# Altium PCB ECUCheater.PcbDoc
Units mm, origin at the board's own origin, x right, y up, seen from the top; angles counter-clockwise.
Board outline 152.4 x 101.6 mm, 2 copper layers (Top Layer, Bottom Layer); 49 components, 79 nets, 177 pads, 17 vias.
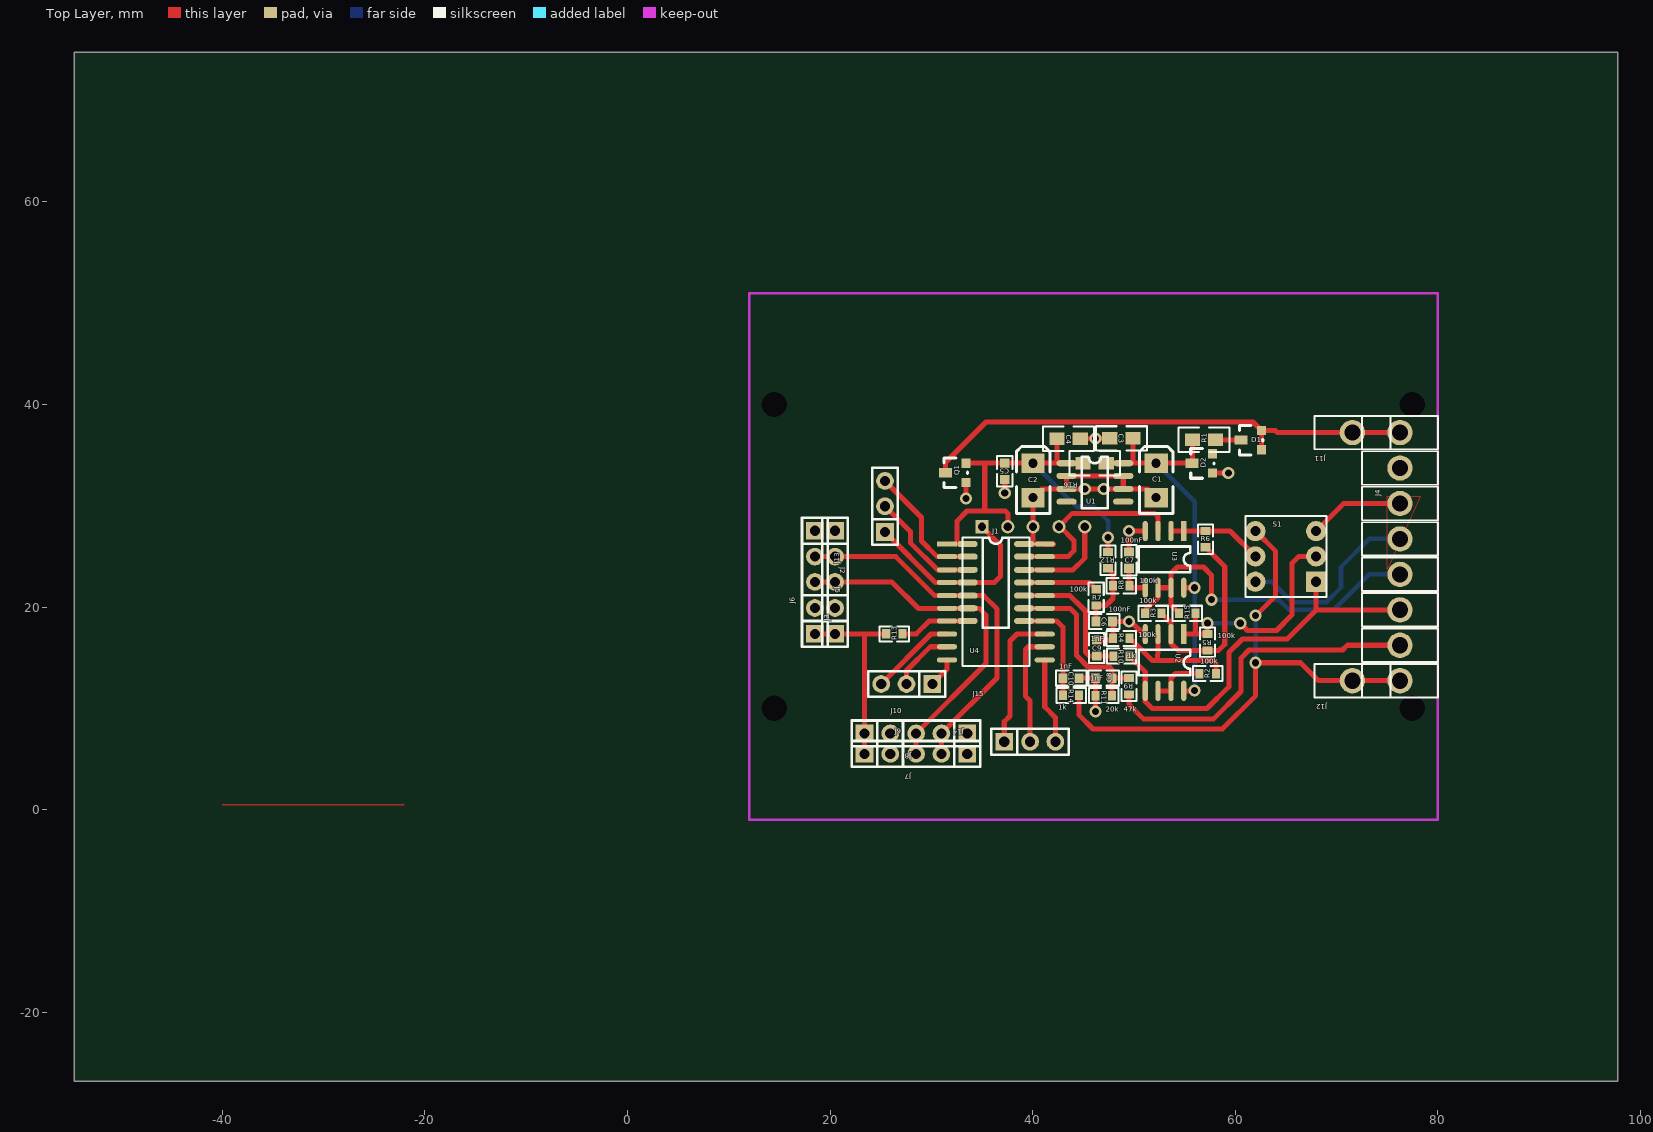
[diagram p0: Top Layer view]
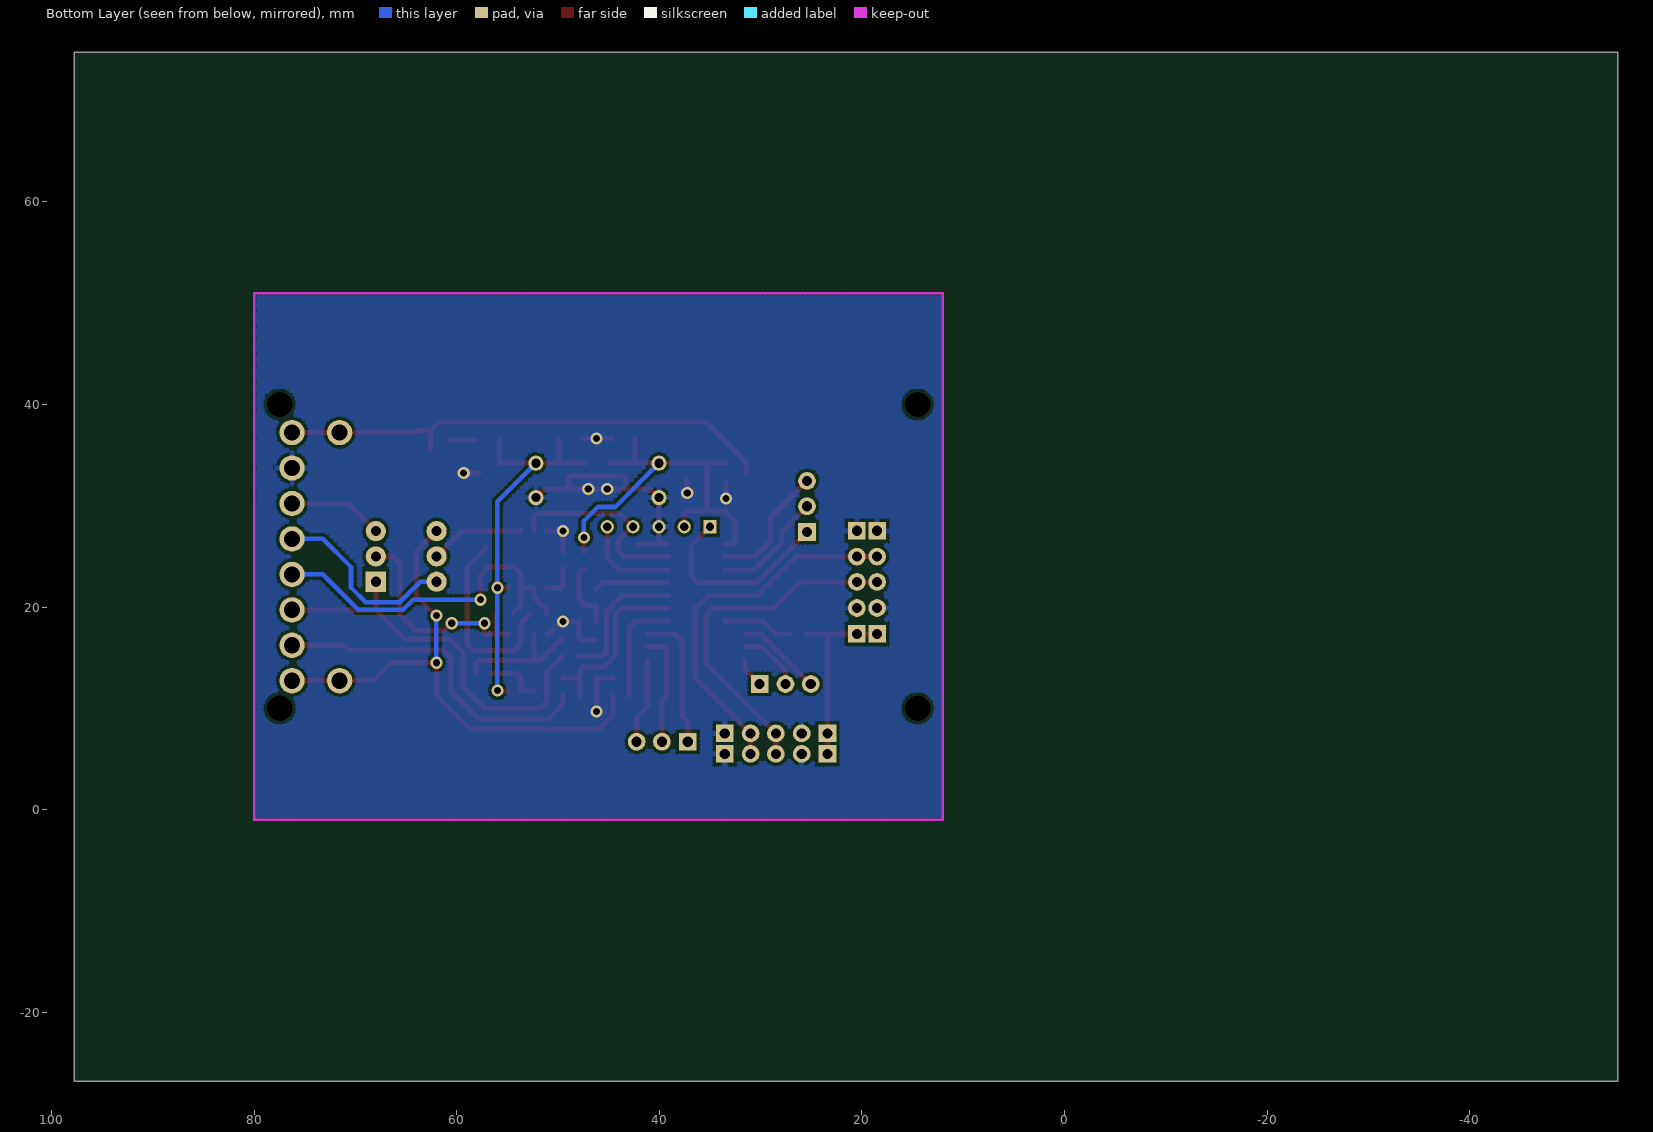
[diagram p1: Bottom Layer view, seen from below]

## Layer stack, top to bottom
Top Solder: solder mask 0.0102, Solder Resist, Dk 3.5
Top Layer: signal copper 0.0356
Dielectric1: dielectric 0.32, FR-4, Dk 4.8
Bottom Layer: signal copper 0.0356
Bottom Solder: solder mask 0.0102, Solder Resist, Dk 3.5

## Board outline
-54.625,-26.825 97.775,-26.825 97.775,74.775 -54.625,74.775

## Design rules (kind name [scope] priority, off if disabled: settings)
Clearance "Clearance Keepout" [OnLayer('Keep-Out Layer')] p1: gap=0
Clearance [All] p2: gap=0.3
Clearance "Clearance Polygon" [All vs (IsPolygon)] p3: gap=0.5
ComponentClearance [All] p1 off: gap=0 collisioncheckmode=3 verticalgap=0.254 showdistances=FALSE
FabricationTestPointUsage TestPointUsage [All] p1: valid=0 allowmultiple=FALSE
FabricationTestpoint Testpoint [All] p1: side=3 testpointundercomponent=TRUE minsize=1.016 maxsize=2.54 preferedsize=1.524 minholesize=0 maxholesize=1.016 preferedholesize=0.813 testpointgrid=0.025 allowsidetop=TRUE allowsidebottom=TRUE usegrid=TRUE gridtolerance=0
HoleSize [All] p1: absolutevalues=TRUE maxlimit=5 minlimit=0.7 maxpercent=80.000 minpercent=20.000
PolygonConnect PolygonConnect_PGND [InNet('PGND')] p1: connectstyle=Relief reliefconductorwidth=0.5 reliefentries=4 polygonreliefangle="90 Angle" airgapwidth=0.254
PolygonConnect PolygonConnectGND [InNet('GND')] p2: connectstyle=Relief reliefconductorwidth=0.5 reliefentries=4 polygonreliefangle="90 Angle" airgapwidth=0.254
PolygonConnect [All] p3: connectstyle=Direct reliefconductorwidth=0.5 reliefentries=4 polygonreliefangle="90 Angle" airgapwidth=0.254
RoutingVias [All] p1: holewidth=0.711 width=1.27 viastyle="Through Hole" minholewidth=0.711 minwidth=1.27 maxholewidth=0.711 maxwidth=1.27
SolderMaskExpansion [All] p1: expansion=0.102
UnpouredPolygon [All] p1: allowunpoured=FALSE
Width [All] p1: maxlimit=5 minlimit=0.45 preferedwidth=0.5 bottomlayer_prefwidth=0.45 minimp=50.000000 maximp=50.000000 favimp=50.000000
25 further rules are at their usual default settings.

## Components (designator, comment, footprint, x,y, rotation, side; value= is the part's Value field where it differs from the comment)
C1 "330uF" "3528 + RA 6.3mm NOT ROUND" 52.2,34.2 r90 top
C2 "330uF" "3528 + RA 6.3mm NOT ROUND" 40.05,34.2 r90 top
C3 "330nF" 0805 49.925,36.65 r180 top
C4 "100nF" 0805 42.4,36.625 r0 top
C5 "100nF" "0603 CAP" 37.25,33.4 r270 top
C6 "100nF" "0603 CAP" 47.075,18.575 r0 top
C7 "100nF" "0603 CAP" 49.525,24.625 r90 top
C8 "1nF" "0603 CAP" 47.025,12.975 r180 top
C9 "1nF" "0603 CAP" 46.325,15.95 r90 top
C10 "1nF" "0603 CAP" 43.8,12.975 r0 top
D1 "DUAL DIODE BAV70" SOT-23 62.6,35.525 r90 top
D2 "ZENER1" SOT-23 57.775,33.225 r90 top
J1 "CON5" "SIP5 - PGM" 35,27.925 r0 top
J2 "CON3" SIP3 20.5,27.525 r270 top
J3 "LED" SIP2 20.5,17.35 r90 top
J4 "CON8" "HD-351 8P" 76.275,12.725 r90 top
J5 "CON3" SIP3 18.5,27.525 r270 top
J6 "LED" SIP2 18.5,17.35 r90 top
J7 "CON3" SIP3 33.55,5.5 r180 top
J8 "CON3" SIP3 33.55,7.525 r180 top
J9 "LED" SIP2 23.4,5.5 r0 top
J10 "LED" SIP2 23.4,7.525 r0 top
J11 "CON1" "HD-351 1P" 71.575,37.225 r270 top
J12 "CON1" "HD-351 1P" 71.575,12.725 r270 top
J13 "CON3" SIP3 25.425,27.4 r90 top (schematic designator J?)
J14 "CON3" SIP3 30.1,12.4 r180 top (schematic designator J?)
J15 "CON3" SIP3 37.2,6.7 r0 top (schematic designator J?)
Q1 "MOSFET P" SOT-23 33.425,32.3 r90 top
R1 "100" 0805 58.075,36.525 r180 top
R2 "100k" "0603 RES" 57.3,13.425 r180 top
R3 "100k" "0603 RES" 51.925,19.375 r180 top
R4 "100k" "0603 RES" 48.75,16.9 r0 top
R5 "100k" "0603 RES" 57.275,16.525 r270 top
R6 "100k" "0603 RES" 57.075,26.7 r90 top
R7 "100k" "0603 RES" 46.275,20.95 r90 top
R8 "100k" "0603 RES" 48.75,22.1 r180 top
R9 "47k" "0603 RES" 49.525,12.175 r270 top
R10 "1k" "0603 RES" 48.775,15.15 r0 top
R11 "20k" "0603 RES" 47.025,11.25 r0 top
R12 "DNP" "0603 RES" 47.45,24.625 r270 top
R13 "470" "0603 RES" 26.35,17.35 r180 top
R14 "1k" "0603 RES" 43.8,11.275 r0 top
R15 "0" "0603 RES" 55.275,19.375 r0 top (schematic designator R?)
R16 "0" 0805 47.275,34.2 r180 top (schematic designator R?)
S1 "SW DPDT" "BTN P1 ZIPPO" 70,23 r180 top (schematic designator S?)
U1 "LM78L05" "SO-8 VOLTREG" 43.35,34.2 r0 top
U2 "DUAL OPAMP" SO-8 54.925,17.325 r270 top
U3 "DUAL OPAMP" SO-8 54.925,27.5 r270 top
U4 "PIC16F1823 - 29" "SOIC20W SO-14" 31.55,26.225 r0 top

## Footprints (in the part's own frame and the unit in brackets; to place one, negate y for a bottom-side part, rotate by r counter-clockwise, add the part's x,y. Pads: shape width x height; smd on the part's side, far side on the other; paste and mask are expansions set on the pad)
"0603 CAP" [mm]
  rect 0.9x0.95 smd: 1(-0.8,0) 2(0.8,0)
  silkscreen extent -1.5,-0.75 1.5,0.75
"0603 RES" [mm]
  rect 0.8x0.95 smd: 1(-0.8,0) 2(0.8,0)
  silkscreen extent -1.45,-0.75 1.45,0.75
0805 [mm]
  rect 1.5x1.25 smd: 1(0,0) 2(2.3,0)
  silkscreen extent -1.35,-1.2 3.65,1.2
"3528 + RA 6.3mm NOT ROUND" [mm]
  round 1.5 hole 0.9: 1(0,0) 2(-3.4,0)
  rect 1.9x2.3 smd: 1(0,0) 2(-3.4,0)
  silkscreen extent -4.95,-1.65 1.65,1.65
"BTN P1 ZIPPO" [mm]
  rect 2x2 hole 1: 1(2,0.5)
  round 2 hole 1: 2(2,-2) 3(2,-4.5) 4(8,-4.5) 5(8,-2) 6(8,0.5)
  silkscreen extent 1,-6 9,2
"HD-351 1P" [mm]
  round 2.5 hole 1.6: 1(0,0)
  silkscreen extent -1.65,-3.75 1.65,3.75
"HD-351 8P" [mm]
  round 2.5 hole 1.6: 1(0,0) 2(3.5,0) 3(7,0) 4(10.5,0) 5(14,0) 6(17.5,0) 7(21,0) 8(24.5,0)
  silkscreen extent -1.65,-3.75 26.15,3.75
SIP2 [mm]
  rect 1.75x1.75 hole 1: 1(0,0)
  round 1.75 hole 1: 2(2.55,0)
  silkscreen extent -1.27,-1.27 3.81,1.27
SIP3 [mm]
  rect 1.75x1.75 hole 1: 1(0,0)
  round 1.75 hole 1: 2(2.55,0) 3(5.05,0)
  silkscreen extent -1.27,-1.27 6.35,1.27
"SIP5 - PGM" [mm]
  rect 1.3x1.3 hole 0.8: 1(0,0)
  round 1.3 hole 0.8: 2(2.55,0) 3(5.05,0) 4(7.6,0) 5(10.15,0)
SO-8 [mm]
  rect 2x0.5 smd: 1(0,0)
  oval 2x0.5 smd: 2(0,-1.25) 3(0,-2.55) 4(0,-3.8) 5(5.6,-3.8) 6(5.6,-2.55) 7(5.6,-1.25) 8(5.6,0)
  silkscreen extent 1.52,-4.44 4.06,0.64
"SO-8 VOLTREG" [mm]
  oval 2x0.6 smd: 1(5.6,0) 2(0,-2.55) 2(0,-1.25) 2(5.6,-2.55) 2(5.6,-1.25) 3(0,0) ""(0,-3.8) ""(5.6,-3.8)
  silkscreen extent 1.52,-4.44 4.06,0.64
"SOIC20W SO-14" [mm]
  rect 2x0.5 smd: 1(0,0)
  oval 2x0.6 smd: 1(2.025,0) 2(2.025,-1.25) 3(2.025,-2.55) 4(2.025,-3.8) 5(2.025,-5.1) 6(2.025,-6.35) 7(2.025,-7.6) 14(7.625,-7.6) 15(7.625,-6.35) 16(7.625,-5.1) 17(7.625,-3.8) 18(7.625,-2.55) 19(7.625,-1.25) 20(7.625,0)
  oval 2x0.5 smd: 2(0,-1.25) 3(0,-2.55) 4(0,-3.8) 5(0,-5.1) 6(0,-6.35) 7(0,-7.6) 8(0,-8.9) 9(0,-10.15) 10(0,-11.45) 11(9.65,-11.45) 12(9.65,-10.15) 13(9.65,-8.9) 14(9.65,-7.6) 15(9.65,-6.35) 16(9.65,-5.1) 17(9.65,-3.8) 18(9.65,-2.55) 19(9.65,-1.25) 20(9.65,0)
  silkscreen extent 1.52,-12.06 8.13,0.65
SOT-23 [mil]
  rect 36x36 smd: 1(0,0) 3(75,0)
  rect 36x50 smd: 2(38,80)
  silkscreen extent -20,-5 95,85

## Part data
C1 C2: library part "CAPACITOR POL", "Capacitor"
C3 C4 C5 C6 C7 C8 C9 C10: library part CAP, "Capacitor"
D1: library part DIODE, "Diode"
D2: "Zener Diode"
J1 J2 J4 J5 J7 J8 J11 J12 J13 J14 J15: "Connector"
J3 J6 J9 J10: library part CON2, "Connector"
R1 R2 R3 R4 R5 R6 R7 R8 R9 R10 R11 R12 R13 R14 R15 R16: library part RES1
U1: library part VOLTREG
U4: library part PIC16F1828, "Microchip Microcontroller"

## Free pads (board coordinates)
  round 1.5 hole 2.5: 0(14.5,10) 0(14.5,40) 0(77.5,10) 0(77.5,40)

## Via types
v1: diameter 1.2, hole 0.7, Top Layer to Bottom Layer, 17 vias

## Nets (pads, with @x,y where several pads share a name; then routed paths per layer and width w, separated by ;. In a path a pad name is that pad's centre, name@x,y a point inside that pad or via, vN(x,y) a via of type N, cw(c..) or ccw(c..) an arc to the next point about the centre after c; other vN are vias at no path point)
12V: D1.2 R1.1 | length 2.5
  Top Layer w0.5: R1.1@58.11,36.49 D1.2
BOOT: 
CSFB: 
DAC: J1.4 U3.3 U4.19 | length 20.1
  Top Layer w0.5: U4.19@39.175,24.975 43.5,24.975 44.075,25.55 44.075,26.575 42.725,27.925 J1.4 43.925,29.25 52.05,29.25 52.375,28.925 U3.3
DRAIN: 
ENABLE: 
ENPOWER: 
GATE: 
GATE: 
GATEINV: 
GATEOUT: 
GATEOUTINV: 
GND: C1.2 C2.2 C3.2 C4.2 C5.2 C6.2 C7.2 C8.2 C9.2 C10.2 D2.1 J1.3 J2.1 J3.2 J4.7 J5.1 J6.2 J7.1 J8.1 J9.2 J10.2 Q1.1 R4.1 R11.1 U1.2 U2.4 U3.4 U4.20 | length 51.8
  Top Layer w0.5: v1(33.425,30.725) Q1.1 ; v1(37.25,31.275) C5.2 ; U4.20@39.175,26.225 U4.20@41.2,26.225 ; U4.20@40.05,26.2 J1.3 40.05,30.8 40.9,31.65 51.35,31.65 C1.2@52.2,30.8 ; U4.20@41.2,26.2 U4.20@42.075,26.2 ; U1.2@43.35,31.65 43.35,32.95 48.95,32.95 U1.2@48.95,31.65 ; C10.2 C8.2 R11.1 46.2,11.225 v1(46.2,9.7) ; C4.2 C3.2@47.6,36.625 ; C9.2 47.8,16.75 R4.1 47.95,18.5 C6.2 49.45,18.575 v1@49.625,18.75 ; v1(49.525,18.575) 49.7,18.575 50.95,17.325 U2.4 ; C7.2 v1(49.525,27.5) U3.4 ; D2.1 v1(59.325,33.225)
  other v1: 45.15,31.65 47.025,31.65 46.2,36.625
HALL: C8.1 R9.1 R11.2 U4.15 | length 17.8
  Top Layer w0.5: U4.15@39.175,19.875 43.7,19.875 44.325,19.25 44.325,15.225 45.475,14.075 47.6,14.075 47.825,13.85 C8.1 ; R11.2 C8.1 ; R9.1 C8.1
INDICATION: R13.1 U4.7 | length 6.9
  Top Layer w0.5: R13.1 28.525,17.35 29.775,18.6 U4.7@33.575,18.625
IOUT: 
KNOCK: 
LAMBDA1OUT: J4.5 S1.6 | length 18.9
  Bottom Layer w0.45: S1.6 63.6,22.5 65.625,20.475 69,20.475 70.45,21.925 70.45,23.95 73.225,26.725 J4.5
LAMBDAIN: J4.1 J12.1 R14.2 S1.4 | length 54.2
  Top Layer w0.5: R14.2 44.6,9.325 45.975,7.95 58.725,7.95 62.025,11.25 v1(62.025,14.5) 66.45,14.5 67.168,13.782 68.225,12.725 J4.1 ; S1.4 64,25.5 64,21.125 v1(62.025,19.15)
  Bottom Layer w0.45: v1(62.025,14.5) v1(62.025,19.15)
LAMBDAINADC: 
LAMBDAINADC: C10.1 R14.1 U4.14 | length 10.8
  Top Layer w0.5: U4.14@39.175,18.625 42.375,18.625 43,18 R14.1
LAMBDAOUT: R6.2 S1.5 U3.1 U3.2 | length 9.4
  Top Layer w0.5: U3.2 R6.2 59.5,27.5 S1.5
LED: J3.1 J6.1 J9.1 J10.1 R13.2 | length 18.9
  Top Layer w0.5: J6.1 R13.2 ; J9.1 23.4,17.325
LED: 
LEDOUT: 
MAPAMP+: 
MAPAMP-: 
MAPBASE: R2.1 R4.2 U2.3 | length 13.2
  Top Layer w0.5: R4.2 49.65,16.9 51.825,14.725 57.825,14.725 58.1,14.45 R2.1 ; 52.35,14.725 52.375,15.975 U2.3
MAPDEC: R3.1 R5.2 R6.1 U2.2 | length 19.6
  Top Layer w0.5: R3.1 53.675,18.425 53.675,16.4 54.35,15.725 58.375,15.725 58.975,16.325 58.975,24 R6.1
MAPFALL: 
MAPIN: J4.3 R10.2 S1.1 U2.5 | length 39.4
  Top Layer w0.5: R10.2 51.125,13.6 51.125,10.675 51.825,9.975 57.225,9.975 59.375,12.125 59.375,15.5 60.725,16.85 65.15,16.85 68,19.7 S1.1 ; 68,19.725 J4.3
MAPINADC: C9.1 R10.1 U4.16 | length 13.6
  Top Layer w0.5: U4.16@39.175,21.125 43.7,21.125 44.827,19.998 45.225,19.6 45.225,15.55 45.625,15.15 R10.1
MAPINAMP: R2.2 U2.6 U2.7 | length 5.6
  Top Layer w0.5: U2.6 U2.7 53.675,13 54.1,13.425 R2.2
MAPLAMBDA2OUT: J4.6 S1.3 | length 9.4
  Top Layer w0.5: S1.3 70.725,30.225 J4.6
MAPOUT: R5.1 R15.2 S1.2 U2.1 | length 22.5
  Top Layer w0.5: U2.1 R5.1 v1(57.275,18.4) ; 56.075,17.325 R15.2 ; v1(60.5,18.4) 61.225,17.675 64.075,17.675 65.625,19.225 65.625,24.325 66.3,25 S1.2
  Bottom Layer w0.45: v1(57.275,18.4) v1(60.5,18.4)
MAPOUTMCU: 
MCLR: J1.1 J13.1 U4.4 | length 19.5
  Top Layer w0.5: J13.1 30.4,22.425 36.225,22.425 36.825,23.025 36.825,26.1 J1.1 ; J13.1@25.45,27.825 J13.1@25.45,27.925
NetC40_1: 
NetD4_A: 
NetJ4_4: 
NetJ14_1: J14.1 U4.10 | length 3
  Top Layer w0.5: J14.1 31.55,13.85 U4.10
NetJ14_2: J14.2 U4.9 | length 6.3
  Top Layer w0.5: J14.2 27.55,13.725 29.9,16.075 U4.9
NetJ14_3: J14.3 U4.8 | length 8.5
  Top Layer w0.5: J14.3 29.975,17.325 U4.8
NetJ15_1: J15.1 U4.13 | length 13.9
  Top Layer w0.5: J15.1 37.2,8.675 37.775,9.25 37.775,16.65 38.45,17.325 U4.13
NetJ15_2: J15.2 U4.12 | length 11.3
  Top Layer w0.5: J15.2 39.75,10.75 39.3,11.2 39.3,15.825 39.55,16.075 U4.12
NetJ15_3: J15.3 U4.11 | length 8.5
  Top Layer w0.5: U4.11 41.2,10.15 42.25,9.1 J15.3
NetR6_1: 
NetR6_1: 
NetR45_2: 
NetR46_2: 
OP+: 
OP-: 
PCLK: J1.5 U4.18 | length 9.6
  Top Layer w0.5: U4.18@39.175,23.675 44,23.675 45.15,24.825 J1.5
PDAT: 
PEAK: 
PGND: 
POWER: D1.1 D1.3 J4.8 J11.1 Q1.2 | length 49.9
  Top Layer w0.5: Q1.2 31.393,34.268 35.4,38.275 61.755,38.275 D1.3 ; D1.1 D1.3 ; J4.8 64.175,37.225 63.97,37.43 D1.3
PWM_MCU: R7.2 U4.17 | length 7.4
  Top Layer w0.5: U4.17@39.175,22.425 45.6,22.425 R7.2
PWMAMP: J4.4 R3.2 R15.1 U3.6 U3.7 | length 36.1
  Top Layer w0.5: R3.2 51.125,19.7 52.375,20.95 U3.6 U3.7 ; R15.1 53.675,20.175 53.675,23.325 54.3,23.95 56.875,23.95 57.675,23.15 v1(57.675,20.725)
  Bottom Layer w0.45: v1(57.675,20.725) 64.314,20.725 65.314,19.725 69.725,19.725 73.225,23.225 J4.4
PWMAMP: 
PWMAVG: C7.1 R8.1 U3.5 | length 3.4
  Top Layer w0.5: C7.1 49.525,22.125 49.75,21.9 U3.5
PWMINV: 
PWMMED: C6.1 R7.1 R8.2 R12.2 | length 6.7
  Top Layer w0.5: C6.1 R7.1 47.25,20.15 47.95,20.85 47.95,23.325 R12.2
RA4: J13.2 U4.3 | length 11.4
  Top Layer w0.5: J13.2 27.925,27.45 27.925,26.35 30.6,23.675 31.55,23.675 U4.3@33.575,23.675
RA5: J13.3 U4.2 | length 12.6
  Top Layer w0.5: J13.3 29.025,28.85 29.025,26.525 30.575,24.975 U4.2@33.575,24.975
REFPWM: 
RPM: J4.2 R9.2 | length 33.3
  Top Layer w0.5: R9.2 49.525,10.375 50.975,8.925 57.85,8.925 60.575,11.65 60.575,14.95 61.375,15.75 70.6,15.75 71.075,16.225 J4.2
RX: J2.2 J5.2 J7.2 J8.2 U4.5 | length 36.7
  Top Layer w0.5: J5.2 26.5,24.975 30.35,21.125 35.175,21.125 36.475,19.825 36.475,13 J8.2 J7.2
SOURCE: 
TEMPCELL: 
TEMPCELL: 
TESTOUT: 
TX: J2.3 J5.3 J7.3 J8.3 U4.6 | length 34.9
  Top Layer w0.5: J5.3@18.4,22.475 26.1,22.475 28.725,19.85 U4.6@33.575,19.85 ; J7.3 J8.3 35.4,14.425 35.4,19.2 34.725,19.875 U4.6@33.575,19.875
VCC: C2.1 C4.1 C5.1 J1.2 Q1.3 R12.1 R16.2 U1.3 U4.1 | length 44.8
  Top Layer w0.5: Q1.3 33.43,34.2 40.05,34.2 U1.3 R16.2 ; U4.1@33.575,26.225 32.525,26.225 32.525,28.475 33.525,29.475 37.3,29.475 37.55,29.225 J1.2 ; 35.275,29.475 35.275,34.2 ; U1.3@42.4,34.225 C4.1 ; R12.1 v1(47.45,26.85)
  Bottom Layer w0.45: C2.1@40.05,34.2 44.375,29.875 ; 42.175,32.075 42.175,32.05 44.35,29.875 46.075,29.875 47.45,28.5 v1(47.45,26.85)
VCC_DRV: 
VCC_OPAMP: C1.1 C3.1 D2.2 R1.2 R16.1 U1.1 U2.8 U3.8 | length 39.4
  Top Layer w0.5: R16.1 U1.1 55.758,34.2 55.775,34.217 R1.2 ; U1.1@49.925,34.25 C3.1 ; U2.8 v1@55.975,11.725 ; U3.8 v1(56,21.9)
  Bottom Layer w0.45: C1.1@52.2,34.2 56,30.4 v1(56,11.75)
VCC_PIN: 
VIN: 
VOUT: 
pads on no net: D2.3 U1.

## Polygon pours and split planes (outlines as drawn)
GND on Top Layer "Top Layer-GND" (hatched 90Degree grid 0.4 track 0.45, remove dead copper, shelved, pour order 10): -40.025,0.475 -22.025,0.475 -22.025,0.525
DRAIN on Top Layer "Top Layer-DRAIN 2" (hatched 90Degree grid 0.4 track 0.45, remove dead copper, shelved, pour order 4): 75.025,23.725 75.025,30.925 78.275,30.925
DRAIN on Top Layer "Top Layer-DRAIN 3" (hatched 90Degree grid 0.4 track 0.45, remove dead copper, shelved, pour order 2): 75.025,23.725 75.025,30.925 78.275,30.925
GND on Bottom Layer "Bottom Layer-GND" (hatched 90Degree grid 0.4 track 0.45, remove dead copper, pour order 12): 12.16,50.9 79.935,50.9 79.935,-0.85 12.16,-0.85
POWER on Top Paste (hatched 90Degree grid 0.4 track 0.45, remove dead copper): 59.525,34.275 69.525,34.275 69.525,26.7 59.525,26.7
NetR46_2 on Top Paste (hatched 90Degree grid 0.4 track 0.45, remove dead copper): 59.3,12.25 69.3,12.25 69.3,4.725 59.3,4.725
SOURCE on Top Paste (hatched 90Degree grid 0.4 track 0.45, remove dead copper): 50.4,5.9 50.4,19.825 56.625,19.825 56.625,5.9
SOURCE on Top Paste (hatched 90Degree grid 0.4 track 0.45, remove dead copper): 52.85,13.7 52.85,22.25 60.625,22.25 60.625,13.7
SOURCE on Top Paste (hatched 90Degree grid 0.4 track 0.45, remove dead copper): 56.625,5.9 47.3,5.9 47.3,8.375 56.625,8.375
POWER on Top Paste (hatched 90Degree grid 0.4 track 0.45, remove dead copper): 63.975,13.7 79.525,13.7 79.525,15.7 63.975,15.7
DRAIN on Bottom Paste (hatched 90Degree grid 0.4 track 0.45, remove dead copper): 46.765,26 46.765,9.425 44.4,9.425 44.4,25.986 46.8,25.986
SOURCE on Bottom Paste (hatched 90Degree grid 0.4 track 0.45, remove dead copper): 38.45,8.373 56.625,8.373 56.625,3.2 38.466,3.2 38.466,8.45
SOURCE on Bottom Paste (hatched 90Degree grid 0.4 track 0.45, remove dead copper): 56.608,23.15 56.608,6.975 50.425,6.975 50.425,23.136 56.7,23.136
POWER on Bottom Paste (hatched 90Degree grid 0.4 track 0.45, remove dead copper): 64.415,34.289 64.415,26.725 62.05,26.725 62.05,34.283 64.45,34.283
NetR46_2 on Bottom Paste (hatched 90Degree grid 0.4 track 0.45, remove dead copper): 71.443,12.265 71.443,3.2 57.6,3.2 57.6,12.257 71.65,12.257
DRAIN on Bottom Paste (hatched 90Degree grid 0.4 track 0.45, remove dead copper): 48.565,10.875 48.565,9.45 46.2,9.45 46.2,10.874 48.6,10.874
POWER on Bottom Paste (hatched 90Degree grid 0.4 track 0.45, remove dead copper): 71.6,24.43 57.525,24.43 57.525,36.5 71.588,36.5 71.588,24.25
no net on Bottom Paste (hatched 90Degree grid 0.4 track 0.45, remove dead copper): 64,25.795 71.6,25.795 71.6,13.725 64.007,13.725 64.007,25.975
no net on Bottom Paste (hatched 90Degree grid 0.4 track 0.45, remove dead copper): 48.925,20.9 50.925,20.9 50.925,22.35 48.925,22.35
no net on Bottom Paste (hatched 90Degree grid 0.4 track 0.45, remove dead copper): 55.4,13.7 62.65,13.7 62.65,23.15 55.4,23.15
SOURCE on Bottom Paste (hatched 90Degree grid 0.4 track 0.45, remove dead copper): 57.297,23.15 57.297,13.775 55.4,13.775 55.4,23.142 57.325,23.142
no net on Bottom Paste (hatched 90Degree grid 0.4 track 0.45, remove dead copper): 53.45,25.45 59.175,25.45 59.175,36.475 53.45,36.475
no net on Bottom Paste (hatched 90Degree grid 0.4 track 0.45, remove dead copper): 51.5,32.475 53.5,32.475 53.5,33.9 51.5,33.9
no net on Bottom Paste (hatched 90Degree grid 0.4 track 0.45, remove dead copper): 49.575,34.975 51.575,34.975 51.575,36.975 49.575,36.975
no net on Bottom Paste (hatched 90Degree grid 0.4 track 0.45, remove dead copper): 38.525,26 49.325,26 49.325,13.9 38.525,13.9
SOURCE on Bottom Paste (hatched 90Degree grid 0.4 track 0.45, remove dead copper): 43.377,11.675 43.377,3.2 38.466,3.2 38.466,11.668 43.45,11.668
DRAIN on Bottom Paste (hatched 90Degree grid 0.4 track 0.45, remove dead copper): 44.925,18.87 32.5,18.87 32.5,28.575 44.914,28.575 44.914,18.725
DRAIN on Bottom Paste (hatched 90Degree grid 0.4 track 0.45, remove dead copper): 49.356,42.475 49.356,28.15 31.35,28.15 31.35,42.463 49.625,42.463
DRAIN on Bottom Paste (hatched 90Degree grid 0.4 track 0.45, remove dead copper): 24.675,46.725 33.75,46.725 33.75,3.2 24.675,3.2
DRAIN on Bottom Paste (hatched 90Degree grid 0.4 track 0.45, remove dead copper): 27.175,42.562 45.034,41.841 45.034,39.042 48.231,39.042 48.231,37.7 71.575,37.7 71.575,46.725 27.175,46.725
DRAIN on Bottom Paste (hatched 90Degree grid 0.4 track 0.45, remove dead copper): 48.775,35.725 52.15,35.725 52.15,38.125 48.775,38.125

## Keep-outs
Keep-Out Layer:
  lines w0.25: 12,-1 80,-1 80.025,51 12,51 12,-1